# Altium PCB PCB2.PcbDoc
Units mm, origin at the board's own origin, x right, y up, seen from the top; angles counter-clockwise.
Board outline 297 x 210 mm, 2 copper layers (Top Layer, Bottom Layer); 48 components, 17 nets, 222 pads, 6 vias.
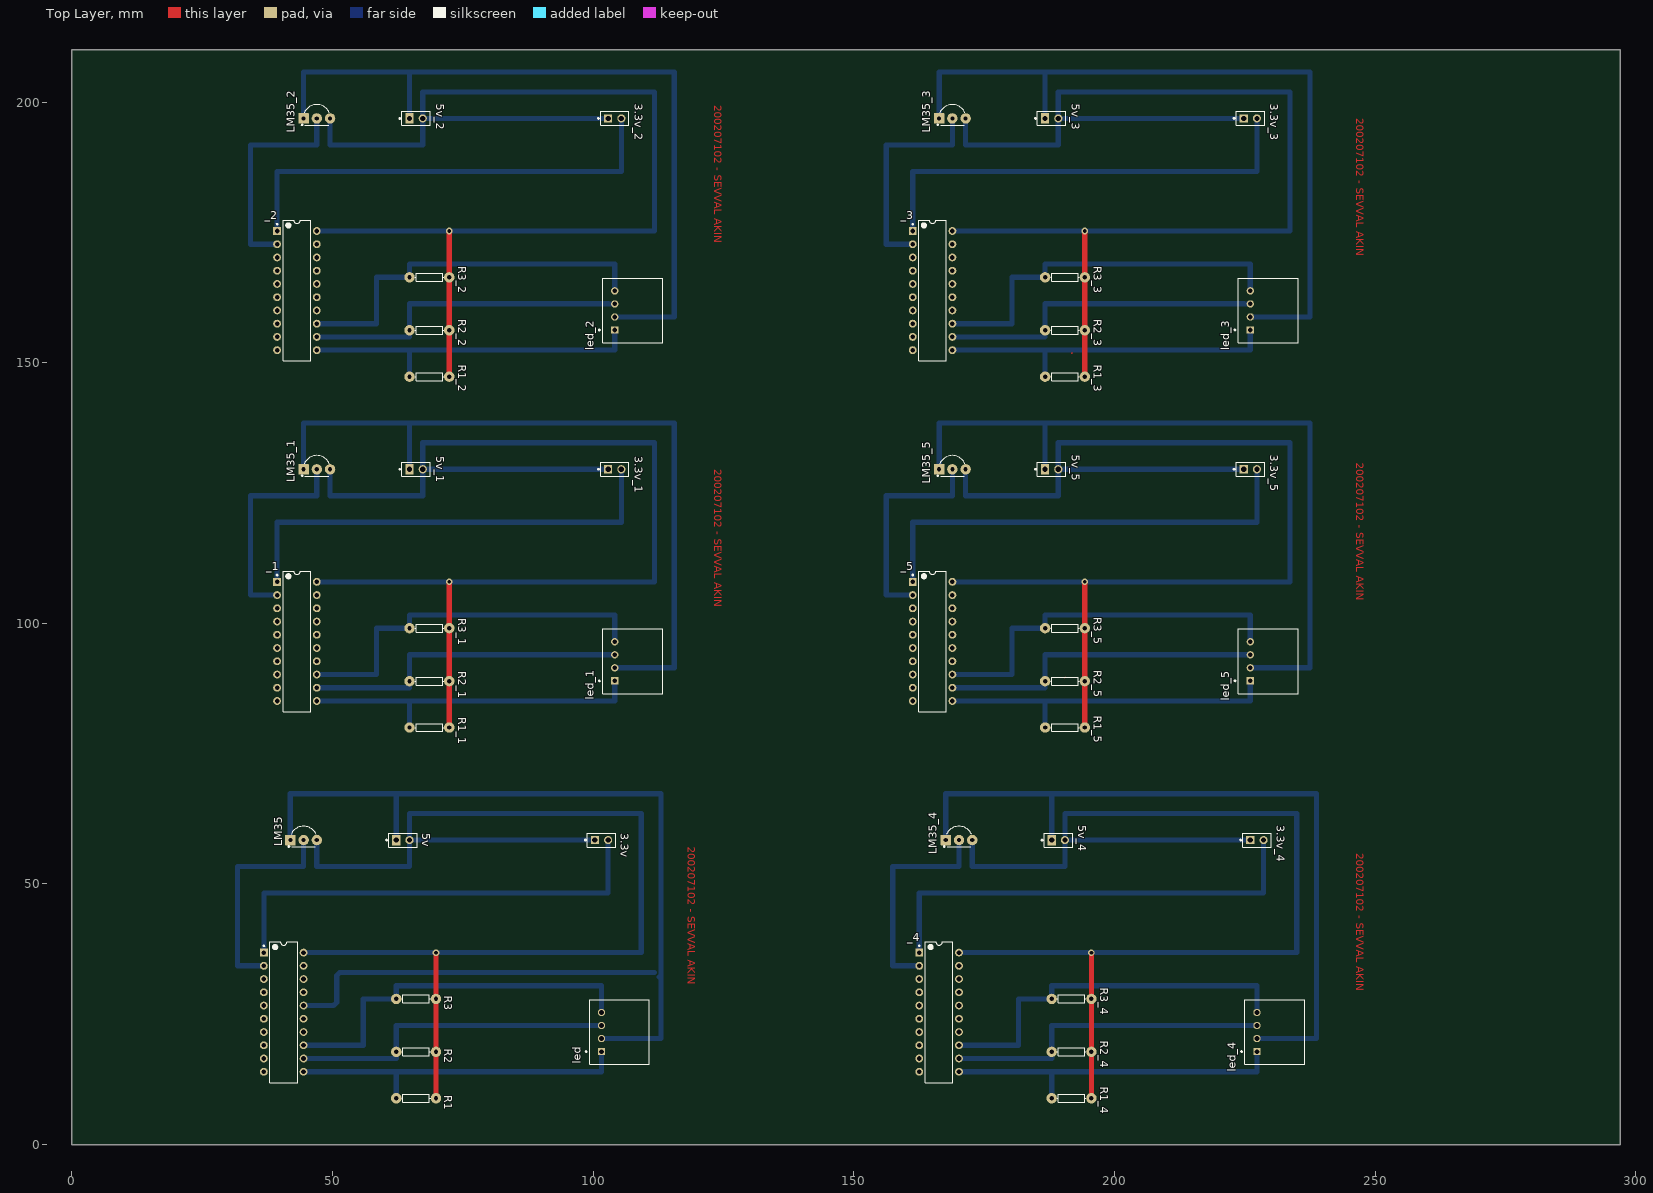
[diagram p0: Top Layer view]
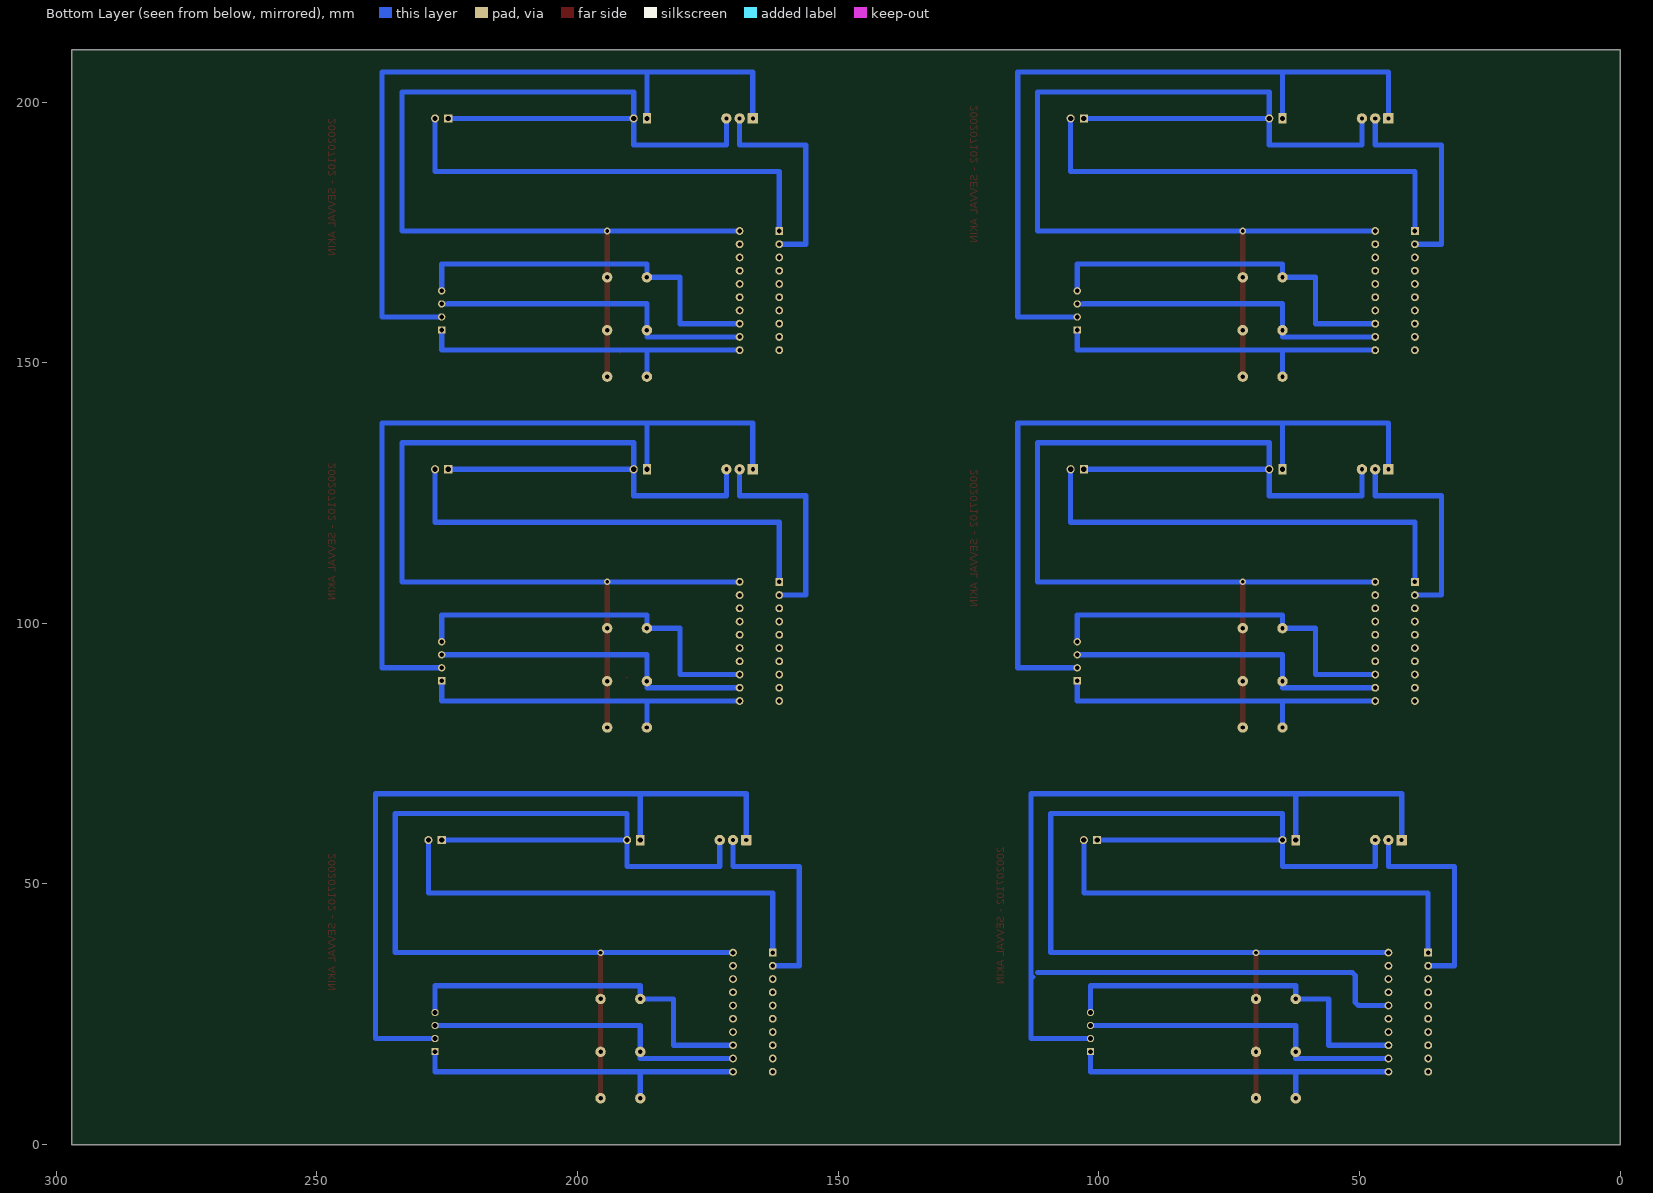
[diagram p1: Bottom Layer view, seen from below]
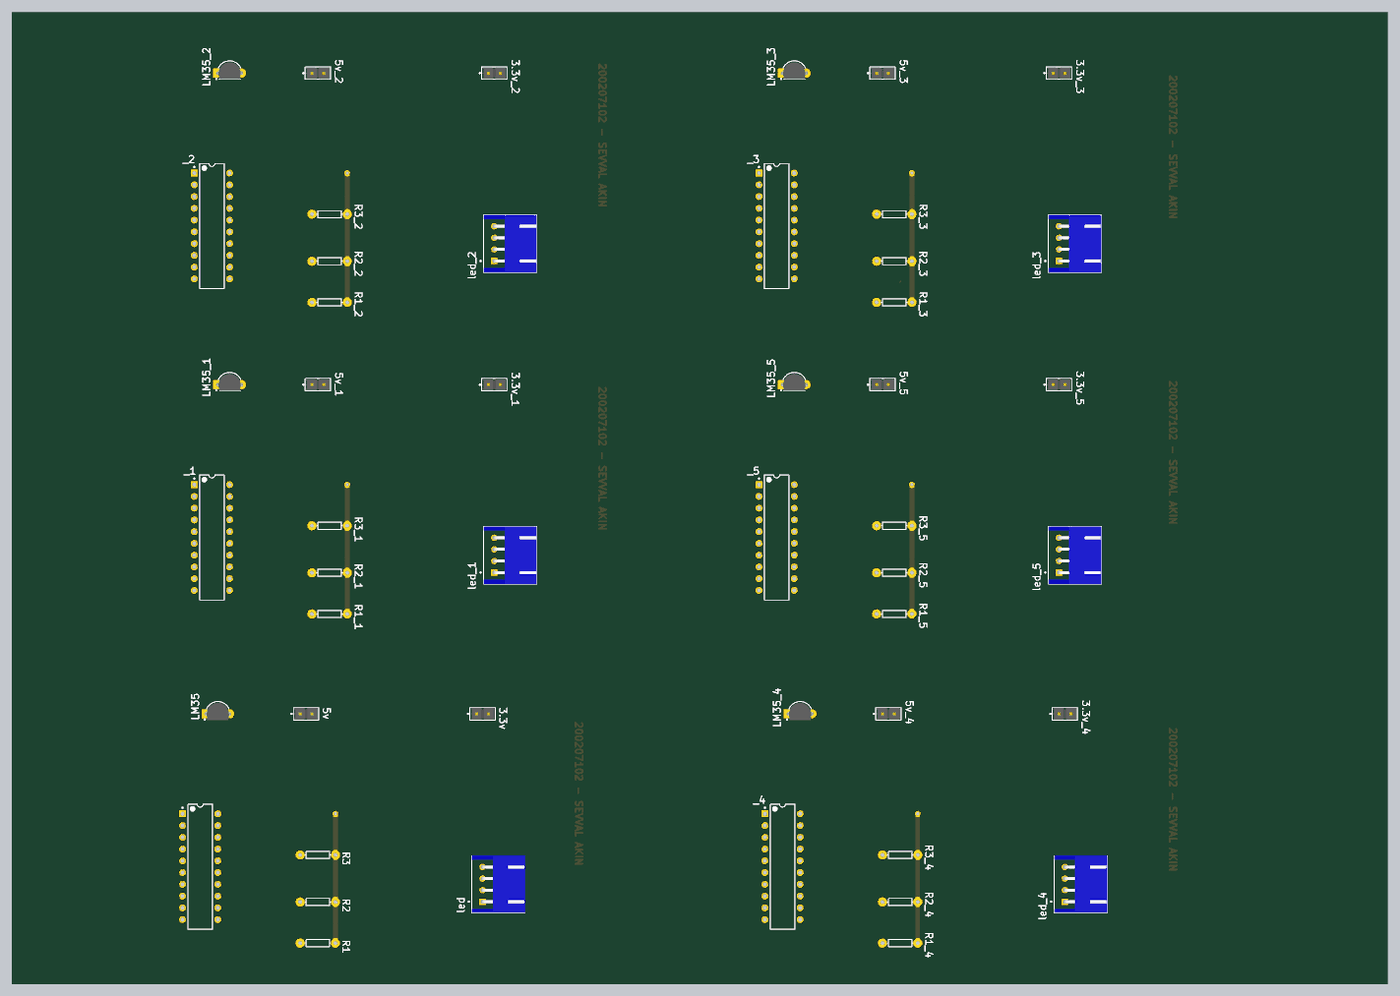
[diagram p2: 3D render of the assembled board from above, using the file's embedded part models]

## Layer stack, top to bottom
Top Solder: solder mask 0.0102, Solder Resist, Dk 3.5
Top Layer: signal copper 0.0356
Dielectric 1: dielectric 0.32, FR-4, Dk 4.8
Bottom Layer: signal copper 0.0356
Bottom Solder: solder mask 0.0102, Solder Resist, Dk 3.5

## Board outline
0,0 0,210 297,210 297,0

## Design rules (kind name [scope] priority, off if disabled: settings)
Clearance [All] p1: gap=0.254 ignorepadtopadclearanceinfootprint=FALSE except(0: Arc-Hole Track-Hole SMDPad-Hole THPad-Hole Via-Hole Fill-Hole Poly-Hole Region-Hole Text-Hole)
PolygonConnect [All] p1: connectstyle=Relief reliefconductorwidth=0.254 reliefentries=4 polygonreliefangle="90 Angle" airgapwidth=0.254
RoutingVias [All] p1: holewidth=0.711 width=1.27 viastyle="Through Hole" minholewidth=0.711 minwidth=1.27 maxholewidth=0.711 maxwidth=1.27
SolderMaskExpansion [All] p1: expansion=0.102 istentingtop=FALSE
Width [All] p1: maxlimit=1 minlimit=1 preferedwidth=1 minimp=50.000000 maximp=50.000000 favimp=50.000000
30 further rules are at their usual default settings.

## Classes and differential pairs
component class Sheet2: 3.3v 5v led R1 R2 R3

## Components (designator, comment, footprint, x,y, rotation, side; value= is the part's Value field where it differs from the comment)
3.3v "Header-3" FP-TSW-102-07-L-S-MFG#1 101.6,58.42 r0 top
3.3v_1 "Header-3" FP-TSW-102-07-L-S-MFG#1 104.14,129.54 r0 top (schematic designator 3.3v)
3.3v_2 "Header-3" FP-TSW-102-07-L-S-MFG#1 104.14,196.85 r0 top (schematic designator 3.3v)
3.3v_3 "Header-3" FP-TSW-102-07-L-S-MFG#1 226.06,196.85 r0 top (schematic designator 3.3v)
3.3v_4 "Header-3" FP-TSW-102-07-L-S-MFG#1 227.33,58.42 r0 top (schematic designator 3.3v)
3.3v_5 "Header-3" FP-TSW-102-07-L-S-MFG#1 226.06,129.54 r0 top (schematic designator 3.3v)
5v "Header-5" FP-TSW-102-07-L-S-MFG#2 63.5,58.42 r0 top
5v_1 "Header-5" FP-TSW-102-07-L-S-MFG#2 66.04,129.54 r0 top (schematic designator 5v)
5v_2 "Header-5" FP-TSW-102-07-L-S-MFG#2 66.04,196.85 r0 top (schematic designator 5v)
5v_3 "Header-5" FP-TSW-102-07-L-S-MFG#2 187.96,196.85 r0 top (schematic designator 5v)
5v_4 "Header-5" FP-TSW-102-07-L-S-MFG#2 189.23,58.42 r0 top (schematic designator 5v)
5v_5 "Header-5" FP-TSW-102-07-L-S-MFG#2 187.96,129.54 r0 top (schematic designator 5v)
_1 "MSP430G2553IN20" N0020A 43.18,96.52 r0 top
_2 "MSP430G2553IN20" N0020A 43.18,163.83 r0 top
_3 "MSP430G2553IN20" N0020A 165.1,163.83 r0 top
_4 "MSP430G2553IN20" N0020A 166.37,25.4 r0 top
_5 "MSP430G2553IN20" N0020A 165.1,96.52 r0 top
led "" JST-S4B-XH-A(LF)(SN)_V 101.6,21.59 r90 top
led_1 "" JST-S4B-XH-A(LF)(SN)_V 104.14,92.71 r90 top (schematic designator led)
led_2 "" JST-S4B-XH-A(LF)(SN)_V 104.14,160.02 r90 top (schematic designator led)
led_3 "" JST-S4B-XH-A(LF)(SN)_V 226.06,160.02 r90 top (schematic designator led)
led_4 "" JST-S4B-XH-A(LF)(SN)_V 227.33,21.59 r90 top (schematic designator led)
led_5 "" JST-S4B-XH-A(LF)(SN)_V 226.06,92.71 r90 top (schematic designator led)
LM35 "" LP0003A 44.45,58.42 r90 top
LM35_1 "" LP0003A 46.99,129.54 r90 top (schematic designator LM35)
LM35_2 "" LP0003A 46.99,196.85 r90 top (schematic designator LM35)
LM35_3 "" LP0003A 168.91,196.85 r90 top (schematic designator LM35)
LM35_4 "" LP0003A 170.18,58.42 r90 top (schematic designator LM35)
LM35_5 "" LP0003A 168.91,129.54 r90 top (schematic designator LM35)
R1 "" AXIAL-0.3 66.04,8.89 r0 top value=100ohm
R1_1 "" AXIAL-0.3 68.58,80.01 r0 top value=100ohm (schematic designator R1)
R1_2 "" AXIAL-0.3 68.58,147.32 r0 top value=100ohm (schematic designator R1)
R1_3 "" AXIAL-0.3 190.5,147.32 r0 top value=100ohm (schematic designator R1)
R1_4 "" AXIAL-0.3 191.77,8.89 r0 top value=100ohm (schematic designator R1)
R1_5 "" AXIAL-0.3 190.5,80.01 r0 top value=100ohm (schematic designator R1)
R2 "" AXIAL-0.3 66.04,17.78 r0 top value=10ohm
R2_1 "" AXIAL-0.3 68.58,88.9 r0 top value=10ohm (schematic designator R2)
R2_2 "" AXIAL-0.3 68.58,156.21 r0 top value=10ohm (schematic designator R2)
R2_3 "" AXIAL-0.3 190.5,156.21 r0 top value=10ohm (schematic designator R2)
R2_4 "" AXIAL-0.3 191.77,17.78 r0 top value=10ohm (schematic designator R2)
R2_5 "" AXIAL-0.3 190.5,88.9 r0 top value=10ohm (schematic designator R2)
R3 "" AXIAL-0.3 66.04,27.94 r0 top value=100ohm
R3_1 "" AXIAL-0.3 68.58,99.06 r0 top value=100ohm (schematic designator R3)
R3_2 "" AXIAL-0.3 68.58,166.37 r0 top value=100ohm (schematic designator R3)
R3_3 "" AXIAL-0.3 190.5,166.37 r0 top value=100ohm (schematic designator R3)
R3_4 "" AXIAL-0.3 191.77,27.94 r0 top value=100ohm (schematic designator R3)
R3_5 "" AXIAL-0.3 190.5,99.06 r0 top value=100ohm (schematic designator R3)
? "MSP430G2553IN20" N0020A 40.64,25.4 r0 top

## Footprints (in the part's own frame and the unit in brackets; to place one, negate y for a bottom-side part, rotate by r counter-clockwise, add the part's x,y. Pads: shape width x height; smd on the part's side, far side on the other; paste and mask are expansions set on the pad)
AXIAL-0.3 [mm] "Axial Device, Thru-Hole; 2 Leads; 0.3 in Pin Spacing"
  round 2 hole 0.85: 1(-3.81,0) 2(3.81,0)
  silkscreen extent -2.77,-0.76 2.77,0.76
FP-TSW-102-07-L-S-MFG#1 [mm]
  rect 1.57x1.57 hole 1.02 paste-1000 mask+0: 1(-1.27,0)
  round 1.57 hole 1.02 paste-1000 mask+0: 2(1.27,0)
  silkscreen extent -3.25,-1.34 2.73,1.34, body extent -2.83,-1.44 2.83,1.44, height 0.25
FP-TSW-102-07-L-S-MFG#2 [mm]
  rect 1.57x2 hole 1.02 paste-1000 mask+0: 1(-1.27,0)
  round 1.57 hole 1.02 paste-1000 mask+0: 2(1.27,0)
  silkscreen extent -3.25,-1.34 2.73,1.34, body extent -2.83,-1.44 2.83,1.44, height 0.25
JST-S4B-XH-A(LF)(SN)_V [mm] "Header, 4-Leads, Body 12.4x11.5mm, Pitch 2.5mm"
  rect 1.4x1.4 hole 0.9: 1(-3.75,0)
  round 1.4 hole 0.9: 2(-1.25,0) 3(1.25,0) 4(3.75,0)
  silkscreen extent -6.2,-9.2 6.2,3.07, body extent -6.2,-9.2 6.2,2.3, height 6.15
LP0003A [mm] "TO, Flat Index; 3 In-Line, Formed Axial Leads; Body Dia. 4.8mm; Leads 0.56 x 0.41 mm (max)"
  rrect7% 2x2 hole 0.8: 1(0,2.54)
  round 2 hole 0.8: 2(0,0) 3(0,-2.54)
  silkscreen extent -1.35,-2.41 2.65,2.95, body extent -1.33,-2.83 2.35,2.83, height 9.01
N0020A [mm] "DIP, 20-Leads, Body 26.9x6.6mm, Pitch 2.54mm"
  rect 1.5x1.5 hole 0.9: 1(-3.81,11.43)
  round 1.5 hole 0.9: 2(-3.81,8.89) 3(-3.81,6.35) 4(-3.81,3.81) 5(-3.81,1.27) 6(-3.81,-1.27) 7(-3.81,-3.81) 8(-3.81,-6.35) 9(-3.81,-8.89) 10(-3.81,-11.43) 11(3.81,-11.43) 12(3.81,-8.89) 13(3.81,-6.35) 14(3.81,-3.81) 15(3.81,-1.27) 16(3.81,1.27) 17(3.81,3.81) 18(3.81,6.35) 19(3.81,8.89) 20(3.81,11.43)
  silkscreen extent -3.93,-13.5 2.65,13.5, body extent -3.95,-13.45 3.95,13.45, height 5.08

## Part data
3.3v 3.3v_1 3.3v_2 3.3v_3 3.3v_4 3.3v_5 5v 5v_1 5v_2 5v_3 5v_4 5v_5: library part CMP-02766-001428-1, "CONN HEADER VERT 2POS 2.54MM", Color=Black, Current Rating=7.6A, Max Operating Temperature=125°C, Max Voltage Rating (AC)=550V, Min Operating Temperature=-55°C, Package Quantity=1, Connector Type="Male Pin", Contact Material=Bronze, Contact Mating Length=0.23inch, Contact Plating=Gold, Contact Type="Male Pin", Depth=2.54mm, Gender=Male, Housing Color=Black, Housing Material=Polyester, Lead Free="Lead Free", Length=5.08mm, Max Current Rating=7.6A, Mount="Through Hole", Number of Contacts=2, Number of Positions=2, Number of Rows=1, Orientation=Straight, Packaging=Bulk, Pitch=2.54mm, Radiation Hardening=No, REACH SVHC="No SVHC", RoHS Compliant=Yes, Series=TSW, Termination=Solder, Voltage Rating=550V, Width=2.54mm
_1 _2 _3 _4 _5 ?: library part CMP-0365-00184-2, "16 MHz Mixed Signal Microcontroller with 16 KB Flash, 512 B SRAM and 24 GPIOs, -40 to 85 degC, 20-pin DIP (N), Pb-Free (RoHS)", Frequency(MHz)=16, Manufacturer="Texas Instruments", Temp Sensor=Yes, ADC="10-bit SAR", ADC Channels=8, Brown Out Reset=Yes, Cap touch I/O=Yes, Code_JEDEC=MS-001, Comparators=Yes, ComponentLink1Description="Manufacturer URL", ComponentLink1URL=http://www.ti.com/, ComponentLink2Description=Datasheet, ComponentLink2URL=http://www.ti.com/general/docs/lit/getliterature.tsp?genericPartNumber=MSP430G2553&fileType=pdf, ComponentLink3Description="Package Specification", ComponentLink3URL=http://www.ti.com/litv/pdf/mpds177g, DatasheetVersion=SLAS735G, Eco-Plan="Pb-Free (RoHS)", Flash(KB)=16, GPIO=24, Mounting Technology="Through Hole", PackageDescription="20-Pin Plastic In-Line, Body 25.40 x 6.35 mm, Pitch 2.54 mm", PackageReference=N0020A, PackageVersion=4040049/E, PartNumber=MSP430G2553IN20, SRAM(B)=512, SubFamily="Value Line", Timers - 16-bit=2, USCI_A (UART/LIN/IrDA/SPI)=1, USCI_B (I2C & SPI)=1, Watchdog=Yes
led led_1 led_2 led_3 led_4 led_5: library part CMP-1755-00007-1, "Male Header, Pitch 2.5 mm, 1 x 4 Position, Height 6.1 mm, Tail Length 3.4 mm, -25 to 85 degC, RoHS, Bulk", ComponentLink1Description="Manufacturer URL", ComponentLink1URL=http://www.jst.com/home2.html, ComponentLink2Description=Datasheet, ComponentLink2URL=http://www.jst-mfg.com/product/pdf/eng/eXH.pdf, DatasheetVersion=May-16, PackageDescription="Male Header, Pitch 2.5 mm, 1 x 4 Position, Height 6.1 mm, Tail Length 3.4 mm", PackageReference=S4B-XH-A(LF)(SN)
LM35 LM35_1 LM35_2 LM35_3 LM35_4 LM35_5: library part CMP-0066-00030-3, "Precision Centigrade Temperature Sensor, 3-pin TO-92, Pb-Free", Manufacturer="Texas Instruments", PackageTopMarking=NSXYTT*LM35*DZ, PowerWise=N, Code_JEDEC=TO-226-AA, ComponentLink1Description="Datasheet URL", ComponentLink1URL=http://www.ti.com/general/docs/lit/getliterature.tsp?genericPartNumber=LM35&fileType=pdf, CompType="Temp Sensor IC", PackageDescription="TO-92, Molded, 3 Lead", PackageReference=LP0003A, PinCount=3, RoHS=Y
R1 R1_1 R1_2 R1_3 R1_4 R1_5 R2 R2_1 R2_2 R2_3 R2_4 R2_5 R3 R3_1 R3_2 R3_3 R3_4 R3_5: library part Res1, "Resistor", LatestRevisionDate=17-Jul-2002, LatestRevisionNote="Re-released for DXP Platform.", PackageDescription="Axial Device, Thru-Hole; 2 Leads; 0.3 in Pin Spacing", PackageReference=AXIAL-0.3, Published=8-Jun-2000, Publisher="Altium Limited"

## Via types
v1: diameter 1.27, hole 0.711, Top Layer to Bottom Layer, 6 vias

## Nets (pads, with @x,y where several pads share a name; then routed paths per layer and width w, separated by ;. In a path a pad name is that pad's centre, name@x,y a point inside that pad or via, vN(x,y) a via of type N, cw(c..) or ccw(c..) an arc to the next point about the centre after c; other vN are vias at no path point)
Net3.3v_1: 3.3v.1 5v.2 ?.20 LM35.3 R1.2 R2.2 R3.2 | length 232.4
  Top Layer w1: R1.2 R2.2 v1(69.85,36.83)
  Bottom Layer w1: ?.20 v1(69.85,36.83) 109.22,36.83 109.22,63.5 64.77,63.5 5v.2 ; LM35.3 46.99,53.34 64.77,53.34 5v.2 ; 3.3v.1 5v.2
Net3.3v_2: 3.3v.2 ?.1 | length 87.6
  Bottom Layer w1: ?.1 36.83,48.26 102.87,48.26 3.3v.2
Net5v_1: 5v.1 led.2 LM35.1 | length 147.8
  Bottom Layer w1: LM35.1 41.91,67.31 62.23,67.31 ; 5v.1 62.23,67.31 ; led.2 113.03,20.34 113.03,32.501 ; 112.663,32.133 113.03,32.501 ; 62.23,67.31 113.03,67.31 113.03,32.501
Net_2: ?.2 LM35.2 | length 41.9
  Bottom Layer w1: ?.2 31.75,34.29 31.75,53.34 44.45,53.34 LM35.2
Net_11: ?.11 led.1 R1.1 | length 66.1
  Bottom Layer w1: ?.11 62.23,13.97 ; R1.1 62.23,13.97 ; led.1 101.6,13.97 62.23,13.97
Net_12: ?.12 led.3 R2.1 | length 63.7
  Top Layer w1: R2.1@62.097,17.647 R2.1
  Bottom Layer w1: ?.12 62.23,16.51 R2.1 62.23,22.86 100.35,22.86 100.35,22.84 led.3
Net_13: ?.13 led.4 R3.1 | length 73.7
  Bottom Layer w1: ?.13 55.88,19.05 55.88,27.94 R3.1 62.23,30.48 101.6,30.48 led.4
NetC1_1: 
NetC1_2: 
NetC2_1: 
NetR1R1_1: 
NetR1R1_2: 
NetR1R1R1_1: 
NetR1R1R1_2: 
NetR1R1R1R1_1: 
NetR1R1R1R1_2: 
NetR1R1R1R1R1R1R1R1R1R1R1R1R1R1R1R1R1R1_2: 
pads on no net: 3.3v_1.1 3.3v_1.2 3.3v_2.1 3.3v_2.2 3.3v_3.1 3.3v_3.2 3.3v_4.1 3.3v_4.2 3.3v_5.1 3.3v_5.2 5v_1.1 5v_1.2 5v_2.1 5v_2.2 5v_3.1 5v_3.2 5v_4.1 5v_4.2 5v_5.1 5v_5.2 ?.3 ?.4 ?.5 ?.6 ?.7 ?.8 ?.9 ?.10 ?.14 ?.15 ?.16 ?.17 ?.18 ?.19 _1.1 _1.2 _1.3 _1.4 _1.5 _1.6 _1.7 _1.8 _1.9 _1.10 _1.11 _1.12 _1.13 _1.14 _1.15 _1.16 _1.17 _1.18 _1.19 _1.20 _2.1 _2.2 _2.3 _2.4 _2.5 _2.6 _2.7 _2.8 _2.9 _2.10 _2.11 _2.12 _2.13 _2.14 _2.15 _2.16 _2.17 _2.18 _2.19 _2.20 _3.1 _3.2 _3.3 _3.4 _3.5 _3.6 _3.7 _3.8 _3.9 _3.10 _3.11 _3.12 _3.13 _3.14 _3.15 _3.16 _3.17 _3.18 _3.19 _3.20 _4.1 _4.2 _4.3 _4.4 _4.5 _4.6 _4.7 _4.8 _4.9 _4.10 _4.11 _4.12 _4.13 _4.14 _4.15 _4.16 _4.17 _4.18 _4.19 _4.20 _5.1 _5.2 _5.3 _5.4 _5.5 _5.6 _5.7 _5.8 _5.9 _5.10 _5.11 _5.12 _5.13 _5.14 _5.15 _5.16 _5.17 _5.18 _5.19 _5.20 led_1.1 led_1.2 led_1.3 led_1.4 led_2.1 led_2.2 led_2.3 led_2.4 led_3.1 led_3.2 led_3.3 led_3.4 led_4.1 led_4.2 led_4.3 led_4.4 led_5.1 led_5.2 led_5.3 led_5.4 LM35_1.1 LM35_1.2 LM35_1.3 LM35_2.1 LM35_2.2 LM35_2.3 LM35_3.1 LM35_3.2 LM35_3.3 LM35_4.1 LM35_4.2 LM35_4.3 LM35_5.1 LM35_5.2 LM35_5.3 R1_1.1 R1_1.2 R1_2.1 R1_2.2 R1_3.1 R1_3.2 R1_4.1 R1_4.2 R1_5.1 R1_5.2 R2_1.1 R2_1.2 R2_2.1 R2_2.2 R2_3.1 R2_3.2 R2_4.1 R2_4.2 R2_5.1 R2_5.2 R3_1.1 R3_1.2 R3_2.1 R3_2.2 R3_3.1 R3_3.2 R3_4.1 R3_4.2 R3_5.1 R3_5.2
copper on no net: | length 3637.3
  Top Layer w0.254: 190.5,89.513 190.649,89.662 ; 191.77,151.743 191.919,151.892
  Top Layer w1: 64.637,88.767 64.77,88.9 ; 64.637,156.077 64.77,156.21 ; 72.39,80.01 72.39,88.9 v1(72.39,107.95) ; 72.39,147.32 72.39,156.21 v1(72.39,175.26) ; 186.557,88.767 186.69,88.9 ; 186.557,156.077 186.69,156.21 ; 187.827,17.647 187.96,17.78 ; 194.31,80.01 194.31,88.9 v1(194.31,107.95) ; 194.31,147.32 194.31,156.21 v1(194.31,175.26) ; 195.58,8.89 195.58,17.78 v1(195.58,36.83)
  Bottom Layer w1: 39.37,105.41 34.29,105.41 34.29,124.46 46.99,124.46 46.99,129.54 ; 39.37,107.95 39.37,119.38 105.41,119.38 105.41,129.54 ; 39.37,172.72 34.29,172.72 34.29,191.77 46.99,191.77 46.99,196.85 ; 39.37,175.26 39.37,186.69 105.41,186.69 105.41,196.85 ; 44.45,26.67 50.214,26.67 50.8,27.256 50.8,32.434 51.386,33.02 111.776,33.02 ; 44.45,129.54 44.45,138.43 64.77,138.43 ; 44.45,196.85 44.45,205.74 64.77,205.74 ; 46.99,85.09 64.77,85.09 ; 46.99,87.63 64.77,87.63 64.77,88.9 64.77,93.98 102.89,93.98 102.89,93.96 104.14,93.96 ; 46.99,90.17 58.42,90.17 58.42,99.06 64.77,99.06 64.77,101.6 104.14,101.6 104.14,96.46 ; 46.99,107.95 v1(72.39,107.95) 111.76,107.95 111.76,134.62 67.31,134.62 67.31,129.54 ; 46.99,152.4 64.77,152.4 ; 46.99,154.94 64.77,154.94 64.77,156.21 64.77,161.29 102.89,161.29 102.89,161.27 104.14,161.27 ; 46.99,157.48 58.42,157.48 58.42,166.37 64.77,166.37 64.77,168.91 104.14,168.91 104.14,163.77 ; 46.99,175.26 v1(72.39,175.26) 111.76,175.26 111.76,201.93 67.31,201.93 67.31,196.85 ; 49.53,129.54 49.53,124.46 67.31,124.46 67.31,129.54 ; 49.53,196.85 49.53,191.77 67.31,191.77 67.31,196.85 ; 64.77,80.01 64.77,85.09 ; 64.77,129.54 64.77,138.43 ; 64.77,147.32 64.77,152.4 ; 64.77,196.85 64.77,205.74 ; 102.87,129.54 67.31,129.54 ; 102.87,196.85 67.31,196.85 ; 104.14,88.96 104.14,85.09 64.77,85.09 ; 104.14,91.46 115.57,91.46 115.57,138.43 64.77,138.43 ; 104.14,156.27 104.14,152.4 64.77,152.4 ; 104.14,158.77 115.57,158.77 115.57,205.74 64.77,205.74 ; 161.29,105.41 156.21,105.41 156.21,124.46 168.91,124.46 168.91,129.54 ; 161.29,107.95 161.29,119.38 227.33,119.38 227.33,129.54 ; 161.29,172.72 156.21,172.72 156.21,191.77 168.91,191.77 168.91,196.85 ; 161.29,175.26 161.29,186.69 227.33,186.69 227.33,196.85 ; 162.56,34.29 157.48,34.29 157.48,53.34 170.18,53.34 170.18,58.42 ; 162.56,36.83 162.56,48.26 228.6,48.26 228.6,58.42 ; 166.37,129.54 166.37,138.43 186.69,138.43 ; 166.37,196.85 166.37,205.74 186.69,205.74 ; 167.64,58.42 167.64,67.31 187.96,67.31 ; 168.91,85.09 186.69,85.09 ; 168.91,87.63 186.69,87.63 186.69,88.9 186.69,93.98 224.81,93.98 224.81,93.96 226.06,93.96 ; 168.91,90.17 180.34,90.17 180.34,99.06 186.69,99.06 186.69,101.6 226.06,101.6 226.06,96.46 ; 168.91,107.95 v1(194.31,107.95) 233.68,107.95 233.68,134.62 189.23,134.62 189.23,129.54 ; 168.91,152.4 186.69,152.4 ; 168.91,154.94 186.69,154.94 186.69,156.21 186.69,161.29 224.81,161.29 224.81,161.27 226.06,161.27 ; 168.91,157.48 180.34,157.48 180.34,166.37 186.69,166.37 186.69,168.91 226.06,168.91 226.06,163.77 ; 168.91,175.26 v1(194.31,175.26) 233.68,175.26 233.68,201.93 189.23,201.93 189.23,196.85 ; 170.18,13.97 187.96,13.97 ; 170.18,16.51 187.96,16.51 187.96,17.78 187.96,22.86 226.08,22.86 226.08,22.84 227.33,22.84 ; 170.18,19.05 181.61,19.05 181.61,27.94 187.96,27.94 187.96,30.48 227.33,30.48 227.33,25.34 ; 170.18,36.83 v1(195.58,36.83) 234.95,36.83 234.95,63.5 190.5,63.5 190.5,58.42 ; 171.45,129.54 171.45,124.46 189.23,124.46 189.23,129.54 ; 171.45,196.85 171.45,191.77 189.23,191.77 189.23,196.85 ; 172.72,58.42 172.72,53.34 190.5,53.34 190.5,58.42 ; 186.69,80.01 186.69,85.09 ; 186.69,129.54 186.69,138.43 ; 186.69,147.32 186.69,152.4 ; 186.69,196.85 186.69,205.74 ; 187.96,8.89 187.96,13.97 ; 187.96,58.42 187.96,67.31 ; 224.79,129.54 189.23,129.54 ; 224.79,196.85 189.23,196.85 ; 226.06,58.42 190.5,58.42 ; 226.06,88.96 226.06,85.09 186.69,85.09 ; 226.06,91.46 237.49,91.46 237.49,138.43 186.69,138.43 ; 226.06,156.27 226.06,152.4 186.69,152.4 ; 226.06,158.77 237.49,158.77 237.49,205.74 186.69,205.74 ; 227.33,17.84 227.33,13.97 187.96,13.97 ; 227.33,20.34 238.76,20.34 238.76,67.31 187.96,67.31

## Other copper
Top Layer:
  text "200207102 - SEVVAL AKIN" at 123.19,199.39 h1.5 r270
  text "200207102 - SEVVAL AKIN" at 246.38,196.85 h1.5 r270
  text "200207102 - SEVVAL AKIN" at 246.38,130.81 h1.5 r270
  text "200207102 - SEVVAL AKIN" at 123.19,129.54 h1.5 r270
  text "200207102 - SEVVAL AKIN" at 118.11,57.15 h1.5 r270
  text "200207102 - SEVVAL AKIN" at 246.38,55.88 h1.5 r270